# Altium PCB PCB2.PcbDoc
Units mil, origin at the board's own origin, x right, y up, seen from the top; angles counter-clockwise.
Board outline 6000 x 4000 mil, 2 copper layers (Top Layer, Bottom Layer); 120 components, 8 nets, 480 pads, 0 vias.
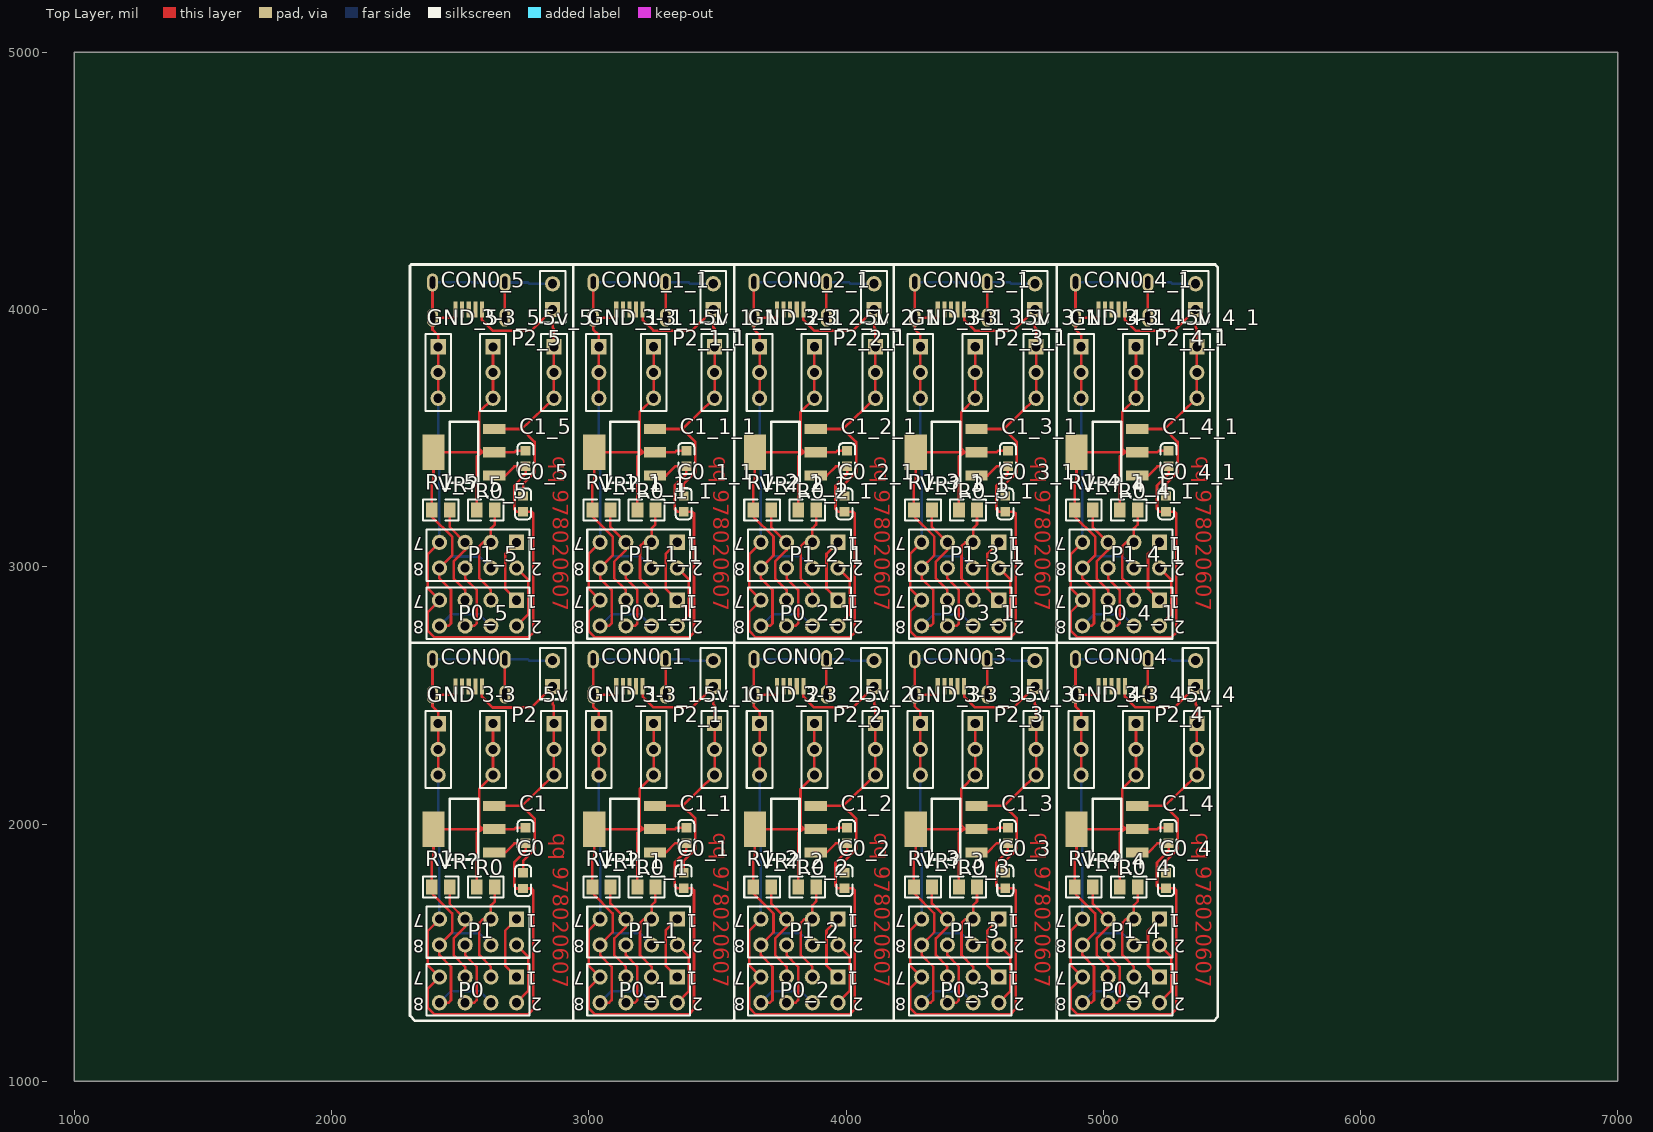
[diagram p0: Top Layer view]
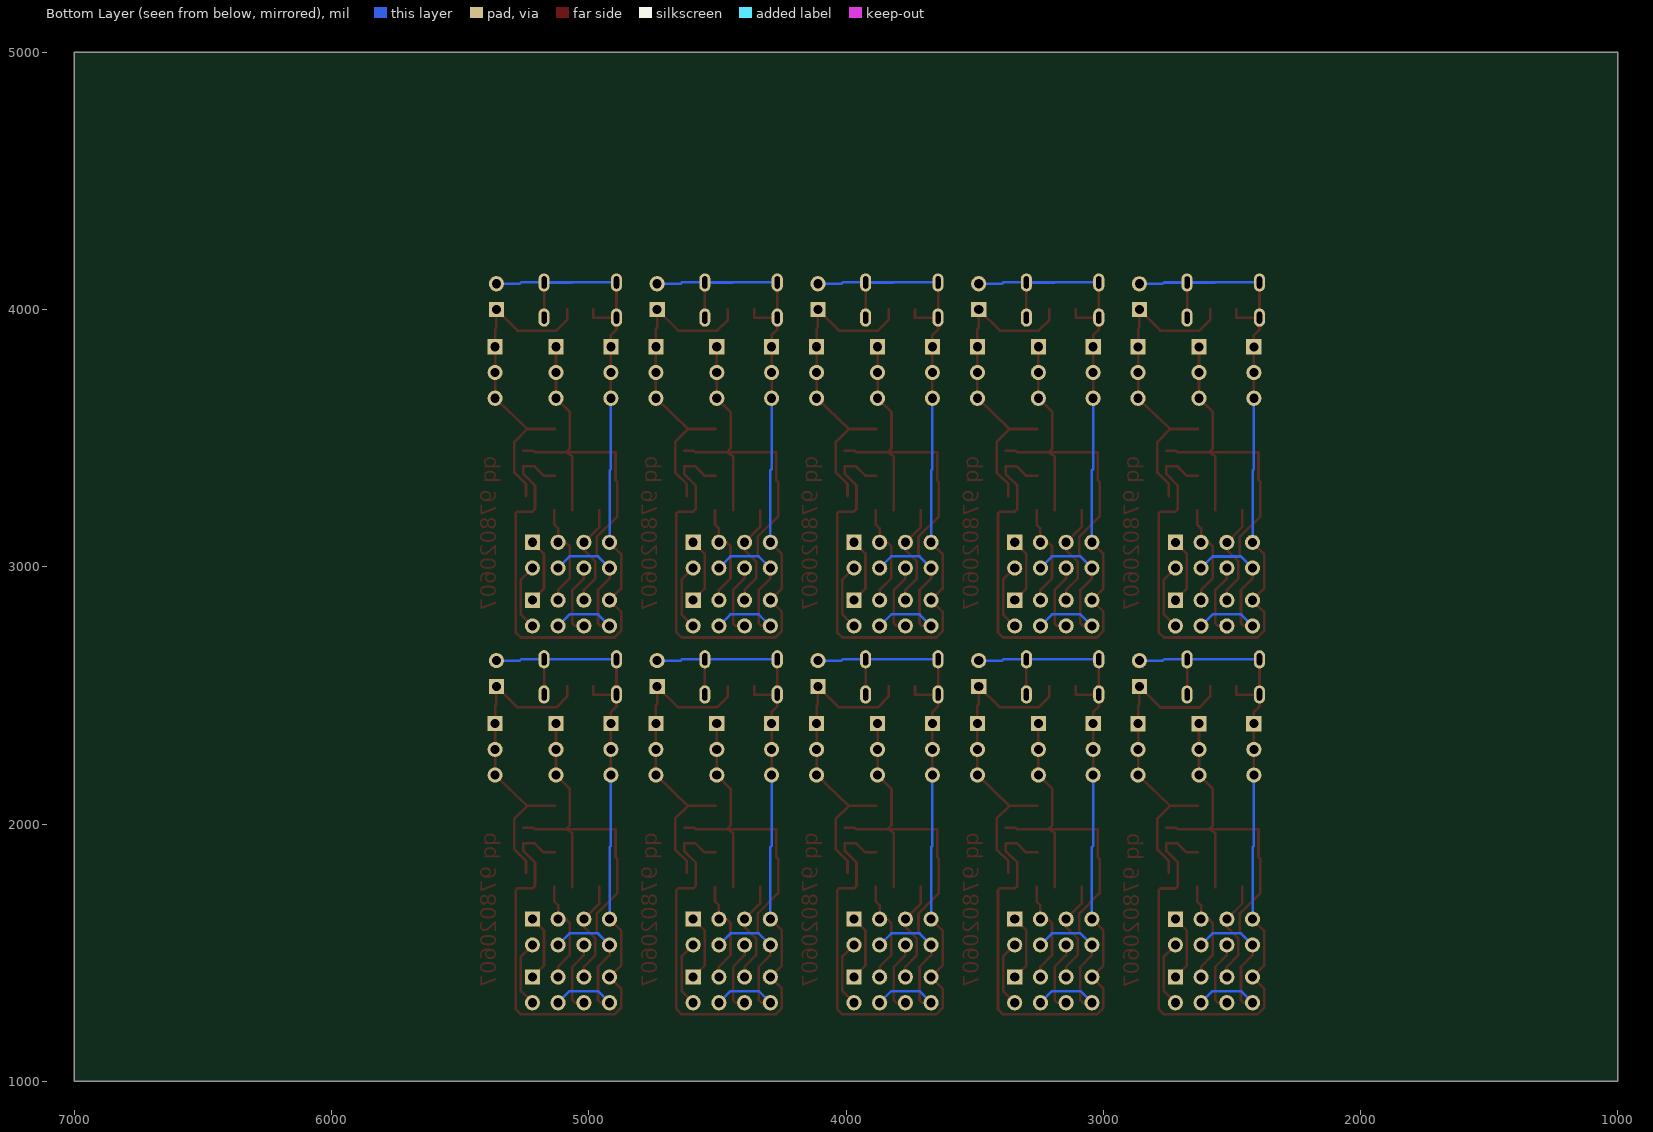
[diagram p1: Bottom Layer view, seen from below]

## Layer stack, top to bottom
Top Solder: solder mask 0.4, Solder Resist, Dk 3.5
Top Layer: signal copper 1.4
Dielectric 1: dielectric 12.6, FR-4, Dk 4.8
Bottom Layer: signal copper 1.4
Bottom Solder: solder mask 0.4, Solder Resist, Dk 3.5

## Board outline
1000,1000 7000,1000 7000,5000 1000,5000

## Design rules (kind name [scope] priority, off if disabled: settings)
Clearance [All] p1: gap=10 ignorepadtopadclearanceinfootprint=FALSE except(0: Arc-Hole Track-Hole SMDPad-Hole THPad-Hole Via-Hole Fill-Hole Poly-Hole Region-Hole Text-Hole)
PolygonConnect [All] p1: connectstyle=Relief reliefconductorwidth=10 reliefentries=4 polygonreliefangle="90 Angle" airgapwidth=10
RoomDefinition Sheet1 [InComponentClass('Sheet1')] p1: confinementstyle=ConfineIn formatcopy=TRUE lockcomponents=FALSE outline 2940,1239.88 2940,2705 2315,2705 2315,1239.88
RoomDefinition Sheet_9 [InComponentClass('Sheet1')] p2: confinementstyle=ConfineIn formatcopy=TRUE lockcomponents=FALSE outline 2940,2704.88 2940,4170 2315,4170 2315,2704.88
RoomDefinition Sheet_8 [InComponentClass('Sheet1')] p3: confinementstyle=ConfineIn formatcopy=TRUE lockcomponents=FALSE outline 3564.57,2705 3564.57,4170.12 2939.57,4170.12 2939.57,2705
RoomDefinition Sheet_7 [InComponentClass('Sheet1')] p4: confinementstyle=ConfineIn formatcopy=TRUE lockcomponents=FALSE outline 4189.57,2705 4189.57,4170.12 3564.57,4170.12 3564.57,2705
RoomDefinition Sheet_6 [InComponentClass('Sheet1')] p5: confinementstyle=ConfineIn formatcopy=TRUE lockcomponents=FALSE outline 4814.57,2705 4814.57,4170.12 4189.57,4170.12 4189.57,2705
RoomDefinition Sheet_5 [InComponentClass('Sheet1')] p6: confinementstyle=ConfineIn formatcopy=TRUE lockcomponents=FALSE outline 5439.57,2705 5439.57,4170.12 4814.57,4170.12 4814.57,2705
RoomDefinition Sheet_4 [InComponentClass('Sheet1')] p7: confinementstyle=ConfineIn formatcopy=TRUE lockcomponents=FALSE outline 5439.57,1240 5439.57,2705.12 4814.57,2705.12 4814.57,1240
RoomDefinition Sheet_3 [InComponentClass('Sheet1')] p8: confinementstyle=ConfineIn formatcopy=TRUE lockcomponents=FALSE outline 4814.57,1240 4814.57,2705.12 4189.57,2705.12 4189.57,1240
RoomDefinition Sheet_2 [InComponentClass('Sheet1')] p9: confinementstyle=ConfineIn formatcopy=TRUE lockcomponents=FALSE outline 4189.57,1240 4189.57,2705.12 3564.57,2705.12 3564.57,1240
RoomDefinition Sheet_1 [InComponentClass('Sheet1')] p10: confinementstyle=ConfineIn formatcopy=TRUE lockcomponents=FALSE outline 3564.57,1240 3564.57,2705.12 2939.57,2705.12 2939.57,1240
RoutingVias [All] p1: holewidth=28 width=50 viastyle="Through Hole" minholewidth=28 minwidth=50 maxholewidth=28 maxwidth=50
SolderMaskExpansion [All] p1: expansion=4
Width [All] p1: maxlimit=10 minlimit=10 preferedwidth=10
30 further rules are at their usual default settings.

## Classes and differential pairs
component class Sheet1: 3-3 5v C0 CON0 GND P0 P1 P2 R0 R1 VR?

## Components (designator, comment, footprint, x,y, rotation, side; value= is the part's Value field where it differs from the comment)
3-3 "Header 3" HDR1X3 2627.68,2390 r270 top
3-3_1 "Header 3" HDR1X3 3252.24,2390.12 r270 top (schematic designator 3-3)
3-3_1_1 "Header 3" HDR1X3 3252.24,3855.12 r270 top (schematic designator 3-3)
3-3_2 "Header 3" HDR1X3 3877.24,2390.12 r270 top (schematic designator 3-3)
3-3_2_1 "Header 3" HDR1X3 3877.24,3855.12 r270 top (schematic designator 3-3)
3-3_3 "Header 3" HDR1X3 4502.24,2390.12 r270 top (schematic designator 3-3)
3-3_3_1 "Header 3" HDR1X3 4502.24,3855.12 r270 top (schematic designator 3-3)
3-3_4 "Header 3" HDR1X3 5127.24,2390.12 r270 top (schematic designator 3-3)
3-3_4_1 "Header 3" HDR1X3 5127.24,3855.12 r270 top (schematic designator 3-3)
3-3_5 "Header 3" HDR1X3 2627.68,3855 r270 top (schematic designator 3-3)
5v "Header 3" HDR1X3 2864.57,2390 r270 top
5v_1 "Header 3" HDR1X3 3489.13,2390.12 r270 top (schematic designator 5v)
5v_1_1 "Header 3" HDR1X3 3489.13,3855.12 r270 top (schematic designator 5v)
5v_2 "Header 3" HDR1X3 4114.13,2390.12 r270 top (schematic designator 5v)
5v_2_1 "Header 3" HDR1X3 4114.13,3855.12 r270 top (schematic designator 5v)
5v_3 "Header 3" HDR1X3 4739.13,2390.12 r270 top (schematic designator 5v)
5v_3_1 "Header 3" HDR1X3 4739.13,3855.12 r270 top (schematic designator 5v)
5v_4 "Header 3" HDR1X3 5364.13,2390.12 r270 top (schematic designator 5v)
5v_4_1 "Header 3" HDR1X3 5364.13,3855.12 r270 top (schematic designator 5v)
5v_5 "Header 3" HDR1X3 2864.57,3855 r270 top (schematic designator 5v)
C0 "10uF (106) 10% 10V" LC-0603_C 2744.57,1779.68 r90 top
C0_1 "10uF (106) 10% 10V" LC-0603_C 3369.13,1779.8 r90 top (schematic designator C0)
C0_1_1 "10uF (106) 10% 10V" LC-0603_C 3369.13,3244.8 r90 top (schematic designator C0)
C0_2 "10uF (106) 10% 10V" LC-0603_C 3994.13,1779.8 r90 top (schematic designator C0)
C0_2_1 "10uF (106) 10% 10V" LC-0603_C 3994.13,3244.8 r90 top (schematic designator C0)
C0_3 "10uF (106) 10% 10V" LC-0603_C 4619.13,1779.8 r90 top (schematic designator C0)
C0_3_1 "10uF (106) 10% 10V" LC-0603_C 4619.13,3244.8 r90 top (schematic designator C0)
C0_4 "10uF (106) 10% 10V" LC-0603_C 5244.13,1779.8 r90 top (schematic designator C0)
C0_4_1 "10uF (106) 10% 10V" LC-0603_C 5244.13,3244.8 r90 top (schematic designator C0)
C0_5 "10uF (106) 10% 10V" LC-0603_C 2744.57,3244.68 r90 top (schematic designator C0)
C1 "10uF (106) 10% 10V" LC-0603_C 2754.57,1955.31 r90 top
C1_1 "10uF (106) 10% 10V" LC-0603_C 3379.13,1955.43 r90 top (schematic designator C1)
C1_1_1 "10uF (106) 10% 10V" LC-0603_C 3379.13,3420.43 r90 top (schematic designator C1)
C1_2 "10uF (106) 10% 10V" LC-0603_C 4004.13,1955.43 r90 top (schematic designator C1)
C1_2_1 "10uF (106) 10% 10V" LC-0603_C 4004.13,3420.43 r90 top (schematic designator C1)
C1_3 "10uF (106) 10% 10V" LC-0603_C 4629.13,1955.43 r90 top (schematic designator C1)
C1_3_1 "10uF (106) 10% 10V" LC-0603_C 4629.13,3420.43 r90 top (schematic designator C1)
C1_4 "10uF (106) 10% 10V" LC-0603_C 5254.13,1955.43 r90 top (schematic designator C1)
C1_4_1 "10uF (106) 10% 10V" LC-0603_C 5254.13,3420.43 r90 top (schematic designator C1)
C1_5 "10uF (106) 10% 10V" LC-0603_C 2754.57,3420.31 r90 top (schematic designator C1)
CON0 "USB_Connector" MicroUSB 2533.39,2503.5 r270 top
CON0_1 "USB_Connector" MicroUSB 3157.95,2503.62 r270 top (schematic designator CON0)
CON0_1_1 "USB_Connector" MicroUSB 3157.95,3968.62 r270 top (schematic designator CON0)
CON0_2 "USB_Connector" MicroUSB 3782.95,2503.62 r270 top (schematic designator CON0)
CON0_2_1 "USB_Connector" MicroUSB 3782.95,3968.62 r270 top (schematic designator CON0)
CON0_3 "USB_Connector" MicroUSB 4407.95,2503.62 r270 top (schematic designator CON0)
CON0_3_1 "USB_Connector" MicroUSB 4407.95,3968.62 r270 top (schematic designator CON0)
CON0_4 "USB_Connector" MicroUSB 5032.95,2503.62 r270 top (schematic designator CON0)
CON0_4_1 "USB_Connector" MicroUSB 5032.95,3968.62 r270 top (schematic designator CON0)
CON0_5 "USB_Connector" MicroUSB 2533.39,3968.5 r270 top (schematic designator CON0)
GND "Header 3" HDR1X3 2414.57,2390 r270 top
GND_1 "Header 3" HDR1X3 3039.13,2390.12 r270 top (schematic designator GND)
GND_1_1 "Header 3" HDR1X3 3039.13,3855.12 r270 top (schematic designator GND)
GND_2 "Header 3" HDR1X3 3664.13,2390.12 r270 top (schematic designator GND)
GND_2_1 "Header 3" HDR1X3 3664.13,3855.12 r270 top (schematic designator GND)
GND_3 "Header 3" HDR1X3 4289.13,2390.12 r270 top (schematic designator GND)
GND_3_1 "Header 3" HDR1X3 4289.13,3855.12 r270 top (schematic designator GND)
GND_4 "Header 3" HDR1X3 4914.13,2390.12 r270 top (schematic designator GND)
GND_4_1 "Header 3" HDR1X3 4914.13,3855.12 r270 top (schematic designator GND)
GND_5 "Header 3" HDR1X3 2414.57,3855 r270 top (schematic designator GND)
P0 "Header 4X2" HDR2X4 2719.57,1405 r180 top
P0_1 "Header 4X2" HDR2X4 3344.13,1405.12 r180 top (schematic designator P0)
P0_1_1 "Header 4X2" HDR2X4 3344.13,2870.12 r180 top (schematic designator P0)
P0_2 "Header 4X2" HDR2X4 3969.13,1405.12 r180 top (schematic designator P0)
P0_2_1 "Header 4X2" HDR2X4 3969.13,2870.12 r180 top (schematic designator P0)
P0_3 "Header 4X2" HDR2X4 4594.13,1405.12 r180 top (schematic designator P0)
P0_3_1 "Header 4X2" HDR2X4 4594.13,2870.12 r180 top (schematic designator P0)
P0_4 "Header 4X2" HDR2X4 5219.13,1405.12 r180 top (schematic designator P0)
P0_4_1 "Header 4X2" HDR2X4 5219.13,2870.12 r180 top (schematic designator P0)
P0_5 "Header 4X2" HDR2X4 2719.57,2870 r180 top (schematic designator P0)
P1 "Header 4X2" HDR2X4 2719.57,1630 r180 top
P1_1 "Header 4X2" HDR2X4 3344.13,1630.12 r180 top (schematic designator P1)
P1_1_1 "Header 4X2" HDR2X4 3344.13,3095.12 r180 top (schematic designator P1)
P1_2 "Header 4X2" HDR2X4 3969.13,1630.12 r180 top (schematic designator P1)
P1_2_1 "Header 4X2" HDR2X4 3969.13,3095.12 r180 top (schematic designator P1)
P1_3 "Header 4X2" HDR2X4 4594.13,1630.12 r180 top (schematic designator P1)
P1_3_1 "Header 4X2" HDR2X4 4594.13,3095.12 r180 top (schematic designator P1)
P1_4 "Header 4X2" HDR2X4 5219.13,1630.12 r180 top (schematic designator P1)
P1_4_1 "Header 4X2" HDR2X4 5219.13,3095.12 r180 top (schematic designator P1)
P1_5 "Header 4X2" HDR2X4 2719.57,3095 r180 top (schematic designator P1)
P2 "Header 2" HDR1X2 2859.57,2535 r90 top
P2_1 "Header 2" HDR1X2 3484.13,2535.12 r90 top (schematic designator P2)
P2_1_1 "Header 2" HDR1X2 3484.13,4000.12 r90 top (schematic designator P2)
P2_2 "Header 2" HDR1X2 4109.13,2535.12 r90 top (schematic designator P2)
P2_2_1 "Header 2" HDR1X2 4109.13,4000.12 r90 top (schematic designator P2)
P2_3 "Header 2" HDR1X2 4734.13,2535.12 r90 top (schematic designator P2)
P2_3_1 "Header 2" HDR1X2 4734.13,4000.12 r90 top (schematic designator P2)
P2_4 "Header 2" HDR1X2 5359.13,2535.12 r90 top (schematic designator P2)
P2_4_1 "Header 2" HDR1X2 5359.13,4000.12 r90 top (schematic designator P2)
P2_5 "Header 2" HDR1X2 2859.57,4000 r90 top (schematic designator P2)
R0 "10KΩ (1002) ±1%" LC-0805_R 2599.61,1755 r180 top
R0_1 "10KΩ (1002) ±1%" LC-0805_R 3224.17,1755.12 r180 top (schematic designator R0)
R0_1_1 "10KΩ (1002) ±1%" LC-0805_R 3224.17,3220.12 r180 top (schematic designator R0)
R0_2 "10KΩ (1002) ±1%" LC-0805_R 3849.17,1755.12 r180 top (schematic designator R0)
R0_2_1 "10KΩ (1002) ±1%" LC-0805_R 3849.17,3220.12 r180 top (schematic designator R0)
R0_3 "10KΩ (1002) ±1%" LC-0805_R 4474.17,1755.12 r180 top (schematic designator R0)
R0_3_1 "10KΩ (1002) ±1%" LC-0805_R 4474.17,3220.12 r180 top (schematic designator R0)
R0_4 "10KΩ (1002) ±1%" LC-0805_R 5099.17,1755.12 r180 top (schematic designator R0)
R0_4_1 "10KΩ (1002) ±1%" LC-0805_R 5099.17,3220.12 r180 top (schematic designator R0)
R0_5 "10KΩ (1002) ±1%" LC-0805_R 2599.61,3220 r180 top (schematic designator R0)
R1 "10KΩ (1002) ±1%" LC-0805_R 2424.57,1755 r180 top
R1_1 "10KΩ (1002) ±1%" LC-0805_R 3049.13,1755.12 r180 top (schematic designator R1)
R1_1_1 "10KΩ (1002) ±1%" LC-0805_R 3049.13,3220.12 r180 top (schematic designator R1)
R1_2 "10KΩ (1002) ±1%" LC-0805_R 3674.13,1755.12 r180 top (schematic designator R1)
R1_2_1 "10KΩ (1002) ±1%" LC-0805_R 3674.13,3220.12 r180 top (schematic designator R1)
R1_3 "10KΩ (1002) ±1%" LC-0805_R 4299.13,1755.12 r180 top (schematic designator R1)
R1_3_1 "10KΩ (1002) ±1%" LC-0805_R 4299.13,3220.12 r180 top (schematic designator R1)
R1_4 "10KΩ (1002) ±1%" LC-0805_R 4924.13,1755.12 r180 top (schematic designator R1)
R1_4_1 "10KΩ (1002) ±1%" LC-0805_R 4924.13,3220.12 r180 top (schematic designator R1)
R1_5 "10KΩ (1002) ±1%" LC-0805_R 2424.57,3220 r180 top (schematic designator R1)
VR? "AMS1117-3.3" LC-SOT-223 2514.57,1980 r0 top
VR?_1 "AMS1117-3.3" LC-SOT-223 3139.13,1980.12 r0 top (schematic designator VR?)
VR?_1_1 "AMS1117-3.3" LC-SOT-223 3139.13,3445.12 r0 top (schematic designator VR?)
VR?_2 "AMS1117-3.3" LC-SOT-223 3764.13,1980.12 r0 top (schematic designator VR?)
VR?_2_1 "AMS1117-3.3" LC-SOT-223 3764.13,3445.12 r0 top (schematic designator VR?)
VR?_3 "AMS1117-3.3" LC-SOT-223 4389.13,1980.12 r0 top (schematic designator VR?)
VR?_3_1 "AMS1117-3.3" LC-SOT-223 4389.13,3445.12 r0 top (schematic designator VR?)
VR?_4 "AMS1117-3.3" LC-SOT-223 5014.13,1980.12 r0 top (schematic designator VR?)
VR?_4_1 "AMS1117-3.3" LC-SOT-223 5014.13,3445.12 r0 top (schematic designator VR?)
VR?_5 "AMS1117-3.3" LC-SOT-223 2514.57,3445 r0 top (schematic designator VR?)

## Footprints (in the part's own frame and the unit in brackets; to place one, negate y for a bottom-side part, rotate by r counter-clockwise, add the part's x,y. Pads: shape width x height; smd on the part's side, far side on the other; paste and mask are expansions set on the pad)
HDR1X2 [mm] "Connector; Header; 2 Position"
  rect 1.5x1.5 hole 0.9: 1(0,0)
  round 1.5 hole 0.9: 2(2.54,0)
  silkscreen extent -1.27,-1.27 3.81,1.27
HDR1X3 [mm] "Connector; Header; 3 Position"
  rect 1.5x1.5 hole 0.9: 1(0,0)
  round 1.5 hole 0.9: 2(2.54,0) 3(5.08,0)
  silkscreen extent -1.27,-1.27 6.35,1.27
HDR2X4 [mm] "Connector; Header; 4x2 Position"
  rect 1.5x1.5 hole 0.9: 1(0,0)
  round 1.5 hole 0.9: 2(0,2.54) 3(2.54,0) 4(2.54,2.54) 5(5.08,0) 6(5.08,2.54) 7(7.62,0) 8(7.62,2.54)
  silkscreen extent -1.27,-1.27 8.89,3.81
LC-0603_C [mm]
  rect 0.93x0.98 smd: 1(-0.77,0) 2(0.77,0)
  silkscreen extent -1.53,-0.79 1.54,0.79, body extent -0.8,-0.4 0.8,0.4, height 0.3
LC-0805_R [mm]
  rect 1.16x1.47 smd: 1(-0.89,0) 2(0.89,0)
  silkscreen extent -1.77,-1.03 1.77,1.03, body extent -1,-0.62 1,0.63, height 0.49
LC-SOT-223 [mm]
  rect 2.2x1 smd: 1(3,-2.3) 2(3,0) 3(3,2.3)
  rect 2.2x3.5 smd: 2(-3,0)
  silkscreen extent -1.4,-3 1.4,3, body extent -3.49,-3.24 3.49,3.24, height 1.64
MicroUSB [mm]
  rect 1.6x0.4 smd mask+0.05: 1(-0.8,1.3) 2(-0.8,0.65) 3(-0.8,0) 4(-0.8,-0.65) 5(-0.8,-1.3)
  oval 1.8x1.1 hole 0.5 slot 1.2 at 0 deg: GND(-3.47,3.575) GND(-3.47,-3.575) GND(0,3.575) GND(0,-3.575)

## Part data
3-3 3-3_1 3-3_1_1 3-3_2 3-3_2_1 3-3_3 3-3_3_1 3-3_4 3-3_4_1 3-3_5 5v 5v_1 5v_1_1 5v_2 5v_2_1 5v_3 5v_3_1 5v_4 5v_4_1 5v_5 GND GND_1 GND_1_1 GND_2 GND_2_1 GND_3 GND_3_1 GND_4 GND_4_1 GND_5: "Header, 3-Pin", LatestRevisionDate=17-Jul-2002, LatestRevisionNote="Re-released for DXP Platform.", Publisher="Altium Limited"
C0 C0_1 C0_1_1 C0_2 C0_2_1 C0_3 C0_3_1 C0_4 C0_4_1 C0_5 C1 C1_1 C1_1_1 C1_2 C1_2_1 C1_3 C1_3_1 C1_4 C1_4_1 C1_5: library part "0603 10uF (106) 10% 10V", "贴片电容", Package=0603, SuppliersPartNumber=C19702, ComponentLink1Description=供?, ComponentLink1URL=http://www.szlcsc.com/product/details_20411.html, Supplier=LC
P0 P0_1 P0_1_1 P0_2 P0_2_1 P0_3 P0_3_1 P0_4 P0_4_1 P0_5 P1 P1_1 P1_1_1 P1_2 P1_2_1 P1_3 P1_3_1 P1_4 P1_4_1 P1_5: "Header, 4-Pin, Dual row", LatestRevisionDate=17-Jul-2002, LatestRevisionNote="Re-released for DXP Platform.", Publisher="Altium Limited"
P2 P2_1 P2_1_1 P2_2 P2_2_1 P2_3 P2_3_1 P2_4 P2_4_1 P2_5: "Header, 2-Pin", LatestRevisionDate=17-Jul-2002, LatestRevisionNote="Re-released for DXP Platform.", Publisher="Altium Limited"
R0 R0_1 R0_1_1 R0_2 R0_2_1 R0_3 R0_3_1 R0_4 R0_4_1 R0_5 R1 R1_1 R1_1_1 R1_2 R1_2_1 R1_3 R1_3_1 R1_4 R1_4_1 R1_5: library part "0805 10KΩ (1002) 1%", "贴片电阻", Package=0805, SuppliersPartNumber=C17414, ComponentLink1Description=供?, ComponentLink1URL=http://www.szlcsc.com/product/details_18102.html, Supplier=LC
VR? VR?_1 VR?_1_1 VR?_2 VR?_2_1 VR?_3 VR?_3_1 VR?_4 VR?_4_1 VR?_5: library part "SOT-223 AMS1117-3.3", "低压差线性稳压(LDO)", Package=SOT-223, SuppliersPartNumber=C6186, ComponentLink1Description=供?, ComponentLink1URL=http://www.szlcsc.com/product/details_6652.html, Supplier=LC

## Nets (pads, with @x,y where several pads share a name; then routed paths per layer and width w, separated by ;. In a path a pad name is that pad's centre, name@x,y a point inside that pad or via, vN(x,y) a via of type N, cw(c..) or ccw(c..) an arc to the next point about the centre after c; other vN are vias at no path point)
Net3-3_1: 3-3.1 3-3.2 3-3.3 C1.2 P0.4 P0.8 P1.4 P1.8 R0.2 R1.2 VR?.2 | length 2300.6
  Top Layer w10: P0.8 2454.57,1305 2464.57,1315 2464.57,1445 2419.57,1490 P1.8 2468.57,1579 2468.57,1652 2389.53,1731.04 R1.2 2389.53,1864 2396.46,1870.93 2396.46,1980 2588.57,1980 ; R0.2 2564.57,1965 2588.57,1980 ; 3-3.1 3-3.2 3-3.3 2573.57,2135.89 2573.57,1995 2588.57,1980 ; C1.2 2716.61,1985.63 2710.99,1980 2632.68,1980 2588.57,1980
  Bottom Layer w10: P0.8 2464.57,1350 2574.57,1350 P0.4 ; P1.8 2464.57,1575 2574.57,1575 P1.4
Net5v_1: 5v.1 5v.2 5v.3 C0.2 CON0.1 P2.1 VR?.3 | length 1293.1
  Top Layer w10: CON0.1 2584.57,2495 2626.57,2453 2777.57,2453 P2.1 2859.57,2465 2864.57,2460 5v.1 5v.2 5v.3 2739.57,2070.55 ; VR?.3 2739.57,2070.55 ; C0.2 2744.57,1856 2789.57,1901 2789.57,2020.55 2739.57,2070.55
NetC0_1: C0.1 C1.1 CON0.5 CON0.GND GND.1 GND.2 GND.3 P0.7 P1.7 P2.2 VR?.1 | length 3444.8
  Top Layer w10: CON0.GND@2392.64,2640.12 2392.64,2503.5 CON0.GND@2392.64,2503 ; GND.3 GND.2 GND.1 2414.57,2435 2392.64,2456.93 CON0.GND@2392.64,2503 ; P1.7 2374.57,1585 2374.57,1450 P0.7 2374.57,1360 2374.57,1285 2399.57,1260 2764.57,1260 2784.57,1280 2784.57,1742.37 2777.57,1749.37 C0.1 2719.57,1749.37 2709.57,1759.37 2709.57,1850 2754.57,1895 C1.1 2711.12,1925 2675.57,1889.45 VR?.1 ; CON0.5 2482.2,2503 CON0.GND@2392.64,2503 ; CON0.GND@2674.14,2503.5 CON0.GND@2674.14,2640.12
  Bottom Layer w10: CON0.GND@2392.64,2640.12 2392.64,2641 2565.57,2641 2566.57,2640 2674.14,2640 2674.14,2640.12 2763.57,2640.12 2768.68,2635 P2.2 ; GND.3 2414.57,1915 2419.57,1910 P1.7
NetP0_1: P0.1 P1.1 | length 262.3
  Top Layer w10: P0.1 2674.57,1450 2674.57,1585 P1.1
NetP0_2: P0.2 P1.2 | length 262.3
  Top Layer w10: P0.2 2764.57,1350 2764.57,1485 P1.2
NetP0_3: P0.3 P1.3 R0.1 | length 411.1
  Top Layer w10: P0.3 2619.57,1445 2574.57,1490 2574.57,1615 2589.57,1630 P1.3 2619.57,1684 2634.64,1699.08 R0.1
NetP0_5: P0.5 P1.5 R1.1 | length 412.1
  Top Layer w10: R1.1 2459.61,1689.96 P1.5 2519.57,1600 2474.57,1555 2474.57,1490 2519.57,1445 P0.5
NetP0_6: P0.6 P1.6 | length 282.8
  Top Layer w10: P0.6 2554.57,1305 2564.57,1315 2564.57,1445 2519.57,1490 P1.6
pads on no net: 3-3_1.1 3-3_1.2 3-3_1.3 3-3_1_1.1 3-3_1_1.2 3-3_1_1.3 3-3_2.1 3-3_2.2 3-3_2.3 3-3_2_1.1 3-3_2_1.2 3-3_2_1.3 3-3_3.1 3-3_3.2 3-3_3.3 3-3_3_1.1 3-3_3_1.2 3-3_3_1.3 3-3_4.1 3-3_4.2 3-3_4.3 3-3_4_1.1 3-3_4_1.2 3-3_4_1.3 3-3_5.1 3-3_5.2 3-3_5.3 5v_1.1 5v_1.2 5v_1.3 5v_1_1.1 5v_1_1.2 5v_1_1.3 5v_2.1 5v_2.2 5v_2.3 5v_2_1.1 5v_2_1.2 5v_2_1.3 5v_3.1 5v_3.2 5v_3.3 5v_3_1.1 5v_3_1.2 5v_3_1.3 5v_4.1 5v_4.2 5v_4.3 5v_4_1.1 5v_4_1.2 5v_4_1.3 5v_5.1 5v_5.2 5v_5.3 C0_1.1 C0_1.2 C0_1_1.1 C0_1_1.2 C0_2.1 C0_2.2 C0_2_1.1 C0_2_1.2 C0_3.1 C0_3.2 C0_3_1.1 C0_3_1.2 C0_4.1 C0_4.2 C0_4_1.1 C0_4_1.2 C0_5.1 C0_5.2 C1_1.1 C1_1.2 C1_1_1.1 C1_1_1.2 C1_2.1 C1_2.2 C1_2_1.1 C1_2_1.2 C1_3.1 C1_3.2 C1_3_1.1 C1_3_1.2 C1_4.1 C1_4.2 C1_4_1.1 C1_4_1.2 C1_5.1 C1_5.2 CON0.2 CON0.3 CON0.4 CON0_1.1 CON0_1.2 CON0_1.3 CON0_1.4 CON0_1.5 CON0_1.GND CON0_1_1.1 CON0_1_1.2 CON0_1_1.3 CON0_1_1.4 CON0_1_1.5 CON0_1_1.GND CON0_2.1 CON0_2.2 CON0_2.3 CON0_2.4 CON0_2.5 CON0_2.GND CON0_2_1.1 CON0_2_1.2 CON0_2_1.3 CON0_2_1.4 CON0_2_1.5 CON0_2_1.GND CON0_3.1 CON0_3.2 CON0_3.3 CON0_3.4 CON0_3.5 CON0_3.GND CON0_3_1.1 CON0_3_1.2 CON0_3_1.3 CON0_3_1.4 CON0_3_1.5 CON0_3_1.GND CON0_4.1 CON0_4.2 CON0_4.3 CON0_4.4 CON0_4.5 CON0_4.GND CON0_4_1.1 CON0_4_1.2 CON0_4_1.3 CON0_4_1.4 CON0_4_1.5 CON0_4_1.GND CON0_5.1 CON0_5.2 CON0_5.3 CON0_5.4 CON0_5.5 CON0_5.GND GND_1.1 GND_1.2 GND_1.3 GND_1_1.1 GND_1_1.2 GND_1_1.3 GND_2.1 GND_2.2 GND_2.3 GND_2_1.1 GND_2_1.2 GND_2_1.3 GND_3.1 GND_3.2 GND_3.3 GND_3_1.1 GND_3_1.2 GND_3_1.3 GND_4.1 GND_4.2 GND_4.3 GND_4_1.1 GND_4_1.2 GND_4_1.3 GND_5.1 GND_5.2 GND_5.3 P0_1.1 P0_1.2 P0_1.3 P0_1.4 P0_1.5 P0_1.6 P0_1.7 P0_1.8 P0_1_1.1 P0_1_1.2 P0_1_1.3 P0_1_1.4 P0_1_1.5 P0_1_1.6 P0_1_1.7 P0_1_1.8 P0_2.1 P0_2.2 P0_2.3 P0_2.4 P0_2.5 P0_2.6 P0_2.7 P0_2.8 P0_2_1.1 P0_2_1.2 P0_2_1.3 P0_2_1.4 P0_2_1.5 P0_2_1.6 P0_2_1.7 P0_2_1.8 P0_3.1 P0_3.2 P0_3.3 P0_3.4 P0_3.5 P0_3.6 P0_3.7 P0_3.8 P0_3_1.1 P0_3_1.2 P0_3_1.3 P0_3_1.4 P0_3_1.5 P0_3_1.6 P0_3_1.7 P0_3_1.8 P0_4.1 P0_4.2 P0_4.3 P0_4.4 P0_4.5 P0_4.6 P0_4.7 P0_4.8 P0_4_1.1 P0_4_1.2 P0_4_1.3 P0_4_1.4 P0_4_1.5 P0_4_1.6 P0_4_1.7 P0_4_1.8 P0_5.1 P0_5.2 P0_5.3 P0_5.4 P0_5.5 P0_5.6 P0_5.7 P0_5.8 P1_1.1 P1_1.2 P1_1.3 P1_1.4 P1_1.5 P1_1.6 P1_1.7 P1_1.8 P1_1_1.1 P1_1_1.2 P1_1_1.3 P1_1_1.4 P1_1_1.5 P1_1_1.6 P1_1_1.7 P1_1_1.8 P1_2.1 P1_2.2 P1_2.3 P1_2.4 P1_2.5 P1_2.6 P1_2.7 P1_2.8 P1_2_1.1 P1_2_1.2 P1_2_1.3 P1_2_1.4 P1_2_1.5 P1_2_1.6 P1_2_1.7 P1_2_1.8 P1_3.1 P1_3.2 P1_3.3 P1_3.4 P1_3.5 P1_3.6 P1_3.7 P1_3.8 P1_3_1.1 P1_3_1.2 P1_3_1.3 P1_3_1.4 P1_3_1.5 P1_3_1.6 P1_3_1.7 P1_3_1.8 P1_4.1 P1_4.2 P1_4.3 P1_4.4 P1_4.5 P1_4.6 P1_4.7 P1_4.8 P1_4_1.1 P1_4_1.2 P1_4_1.3 P1_4_1.4 P1_4_1.5 P1_4_1.6 P1_4_1.7 P1_4_1.8 P1_5.1 P1_5.2 P1_5.3 P1_5.4 P1_5.5 P1_5.6 P1_5.7 P1_5.8 P2_1.1 P2_1.2 P2_1_1.1 P2_1_1.2 P2_2.1 P2_2.2 P2_2_1.1 P2_2_1.2 P2_3.1 P2_3.2 P2_3_1.1 P2_3_1.2 P2_4.1 P2_4.2 P2_4_1.1 P2_4_1.2 P2_5.1 P2_5.2 R0_1.1 R0_1.2 R0_1_1.1 R0_1_1.2 R0_2.1 R0_2.2 R0_2_1.1 R0_2_1.2 R0_3.1 R0_3.2 R0_3_1.1 R0_3_1.2 R0_4.1 R0_4.2 R0_4_1.1 R0_4_1.2 R0_5.1 R0_5.2 R1_1.1 R1_1.2 R1_1_1.1 R1_1_1.2 R1_2.1 R1_2.2 R1_2_1.1 R1_2_1.2 R1_3.1 R1_3.2 R1_3_1.1 R1_3_1.2 R1_4.1 R1_4.2 R1_4_1.1 R1_4_1.2 R1_5.1 R1_5.2 VR?_1.1 VR?_1.2 VR?_1.3 VR?_1_1.1 VR?_1_1.2 VR?_1_1.3 VR?_2.1 VR?_2.2 VR?_2.3 VR?_2_1.1 VR?_2_1.2 VR?_2_1.3 VR?_3.1 VR?_3.2 VR?_3.3 VR?_3_1.1 VR?_3_1.2 VR?_3_1.3 VR?_4.1 VR?_4.2 VR?_4.3 VR?_4_1.1 VR?_4_1.2 VR?_4_1.3 VR?_5.1 VR?_5.2 VR?_5.3
copper on no net: | length 78021.6
  Top Layer w10: 2392.64,4105.12 2392.64,3968.5 2392.64,3968 ; 2414.57,3655 2414.57,3755 2414.57,3855 2414.57,3900 2392.64,3921.93 2392.64,3968 ; 2419.57,2770 2454.57,2770 2464.57,2780 2464.57,2910 2419.57,2955 2419.57,2995 2468.57,3044 2468.57,3117 2389.53,3196.04 2389.53,3220 2389.53,3329 2396.46,3335.93 2396.46,3445 2588.57,3445 ; 2419.57,3095 2374.57,3050 2374.57,2915 2419.57,2870 2374.57,2825 2374.57,2750 2399.57,2725 2764.57,2725 2784.57,2745 2784.57,3207.37 2777.57,3214.37 2744.57,3214.37 2719.57,3214.37 2709.57,3224.37 2709.57,3315 2754.57,3360 2754.57,3390 2711.12,3390 2675.57,3354.45 2632.68,3354.45 ; 2459.61,3220 2459.61,3154.96 2519.57,3095 2519.57,3065 2474.57,3020 2474.57,2955 2519.57,2910 2519.57,2870 ; 2482.2,4000 2482.2,3968 2392.64,3968 ; 2519.57,2770 2554.57,2770 2564.57,2780 2564.57,2910 2519.57,2955 2519.57,2995 ; 2564.57,3220 2564.57,3430 2588.57,3445 ; 2584.57,4000 2584.57,3960 2626.57,3918 2777.57,3918 2859.57,4000 2859.57,3930 2864.57,3925 2864.57,3855 2864.57,3755 2864.57,3655 2739.57,3535.55 ; 2619.57,2870 2619.57,2910 2574.57,2955 2574.57,3080 2589.57,3095 2619.57,3095 2619.57,3149 2634.64,3164.08 2634.64,3220 ; 2627.68,3855 2627.68,3755 2627.68,3655 2573.57,3600.89 2573.57,3460 2588.57,3445 ; 2632.68,3535.55 2739.57,3535.55 ; 2674.14,3968.5 2674.14,4105.12 ; 2719.57,2770 2764.57,2815 2764.57,2950 2719.57,2995 ; 2719.57,2870 2674.57,2915 2674.57,3050 2719.57,3095 ; 2744.57,3275 2744.57,3321 2789.57,3366 2789.57,3485.55 2739.57,3535.55 ; 2754.57,3450.63 2716.61,3450.63 2710.99,3445 2632.68,3445 2588.57,3445 ; 3017.2,2640.24 3017.2,2503.62 3017.2,2503.12 ; 3017.2,4105.24 3017.2,3968.62 3017.2,3968.12 ; 3039.13,2190.12 3039.13,2290.12 3039.13,2390.12 3039.13,2435.12 3017.2,2457.05 3017.2,2503.12 ; 3039.13,3655.12 3039.13,3755.12 3039.13,3855.12 3039.13,3900.12 3017.2,3922.05 3017.2,3968.12 ; 3044.13,1305.12 3079.13,1305.12 3089.13,1315.12 3089.13,1445.12 3044.13,1490.12 3044.13,1530.12 3093.13,1579.12 3093.13,1652.12 3014.09,1731.16 3014.09,1755.12 3014.09,1864.12 3021.02,1871.05 3021.02,1980.12 3213.13,1980.12 ; 3044.13,1630.12 2999.13,1585.12 2999.13,1450.12 3044.13,1405.12 2999.13,1360.12 2999.13,1285.12 3024.13,1260.12 3389.13,1260.12 3409.13,1280.12 3409.13,1742.49 3402.13,1749.49 3369.13,1749.49 3344.13,1749.49 3334.13,1759.49 3334.13,1850.12 3379.13,1895.12 3379.13,1925.12 3335.69,1925.12 3300.13,1889.57 3257.24,1889.57 ; 3044.13,2770.12 3079.13,2770.12 3089.13,2780.12 3089.13,2910.12 3044.13,2955.12 3044.13,2995.12 3093.13,3044.12 3093.13,3117.12 3014.09,3196.16 3014.09,3220.12 3014.09,3329.12 3021.02,3336.05 3021.02,3445.12 3213.13,3445.12 ; 3044.13,3095.12 2999.13,3050.12 2999.13,2915.12 3044.13,2870.12 2999.13,2825.12 2999.13,2750.12 3024.13,2725.12 3389.13,2725.12 3409.13,2745.12 3409.13,3207.49 3402.13,3214.49 3369.13,3214.49 3344.13,3214.49 3334.13,3224.49 3334.13,3315.12 3379.13,3360.12 3379.13,3390.12 3335.69,3390.12 3300.13,3354.57 3257.24,3354.57 ; 3084.17,1755.12 3084.17,1690.08 3144.13,1630.12 3144.13,1600.12 3099.13,1555.12 3099.13,1490.12 3144.13,1445.12 3144.13,1405.12 ; 3084.17,3220.12 3084.17,3155.08 3144.13,3095.12 3144.13,3065.12 3099.13,3020.12 3099.13,2955.12 3144.13,2910.12 3144.13,2870.12 ; 3106.77,2535.12 3106.77,2503.12 3017.2,2503.12 ; 3106.77,4000.12 3106.77,3968.12 3017.2,3968.12 ; 3144.13,1305.12 3179.13,1305.12 3189.13,1315.12 3189.13,1445.12 3144.13,1490.12 3144.13,1530.12 ; 3144.13,2770.12 3179.13,2770.12 3189.13,2780.12 3189.13,2910.12 3144.13,2955.12 3144.13,2995.12 ; 3189.13,1755.12 3189.13,1965.12 3213.13,1980.12 ; 3189.13,3220.12 3189.13,3430.12 3213.13,3445.12 ; 3209.13,2535.12 3209.13,2495.12 3251.13,2453.12 3402.13,2453.12 3484.13,2535.12 3484.13,2465.12 3489.13,2460.12 3489.13,2390.12 3489.13,2290.12 3489.13,2190.12 3364.13,2070.67 ; 3209.13,4000.12 3209.13,3960.12 3251.13,3918.12 3402.13,3918.12 3484.13,4000.12 3484.13,3930.12 3489.13,3925.12 3489.13,3855.12 3489.13,3755.12 3489.13,3655.12 3364.13,3535.67 ; 3244.13,1405.12 3244.13,1445.12 3199.13,1490.12 3199.13,1615.12 3214.13,1630.12 3244.13,1630.12 3244.13,1684.12 3259.21,1699.2 3259.21,1755.12 ; 3244.13,2870.12 3244.13,2910.12 3199.13,2955.12 3199.13,3080.12 3214.13,3095.12 3244.13,3095.12 3244.13,3149.12 3259.21,3164.2 3259.21,3220.12 ; 3252.24,2390.12 3252.24,2290.12 3252.24,2190.12 3198.13,2136.01 3198.13,1995.12 3213.13,1980.12 ; 3252.24,3855.12 3252.24,3755.12 3252.24,3655.12 3198.13,3601.01 3198.13,3460.12 3213.13,3445.12 ; 3257.24,2070.67 3364.13,2070.67 ; 3257.24,3535.67 3364.13,3535.67 ; 3298.7,2503.62 3298.7,2640.24 ; 3298.7,3968.62 3298.7,4105.24 ; 3344.13,1305.12 3389.13,1350.12 3389.13,1485.12 3344.13,1530.12 ; 3344.13,1405.12 3299.13,1450.12 3299.13,1585.12 3344.13,1630.12 ; 3344.13,2770.12 3389.13,2815.12 3389.13,2950.12 3344.13,2995.12 ; 3344.13,2870.12 3299.13,2915.12 3299.13,3050.12 3344.13,3095.12 ; 3369.13,1810.12 3369.13,1856.12 3414.13,1901.12 3414.13,2020.67 3364.13,2070.67 ; 3369.13,3275.12 3369.13,3321.12 3414.13,3366.12 3414.13,3485.67 3364.13,3535.67 ; 3379.13,1985.75 3341.18,1985.75 3335.55,1980.12 3257.24,1980.12 3213.13,1980.12 ; 3379.13,3450.75 3341.18,3450.75 3335.55,3445.12 3257.24,3445.12 3213.13,3445.12 ; 3642.2,2640.24 3642.2,2503.62 3642.2,2503.12 ; 3642.2,4105.24 3642.2,3968.62 3642.2,3968.12 ; 3664.13,2190.12 3664.13,2290.12 3664.13,2390.12 3664.13,2435.12 3642.2,2457.05 3642.2,2503.12 ; 3664.13,3655.12 3664.13,3755.12 3664.13,3855.12 3664.13,3900.12 3642.2,3922.05 3642.2,3968.12 ; 3669.13,1305.12 3704.13,1305.12 3714.13,1315.12 3714.13,1445.12 3669.13,1490.12 3669.13,1530.12 3718.13,1579.12 3718.13,1652.12 3639.09,1731.16 3639.09,1755.12 3639.09,1864.12 3646.02,1871.05 3646.02,1980.12 3838.13,1980.12 ; 3669.13,1630.12 3624.13,1585.12 3624.13,1450.12 3669.13,1405.12 3624.13,1360.12 3624.13,1285.12 3649.13,1260.12 4014.13,1260.12 4034.13,1280.12 4034.13,1742.49 4027.13,1749.49 3994.13,1749.49 3969.13,1749.49 3959.13,1759.49 3959.13,1850.12 4004.13,1895.12 4004.13,1925.12 3960.69,1925.12 3925.13,1889.57 3882.24,1889.57 ; 3669.13,2770.12 3704.13,2770.12 3714.13,2780.12 3714.13,2910.12 3669.13,2955.12 3669.13,2995.12 3718.13,3044.12 3718.13,3117.12 3639.09,3196.16 3639.09,3220.12 3639.09,3329.12 3646.02,3336.05 3646.02,3445.12 3838.13,3445.12 ; 3669.13,3095.12 3624.13,3050.12 3624.13,2915.12 3669.13,2870.12 3624.13,2825.12 3624.13,2750.12 3649.13,2725.12 4014.13,2725.12 4034.13,2745.12 4034.13,3207.49 4027.13,3214.49 3994.13,3214.49 3969.13,3214.49 3959.13,3224.49 3959.13,3315.12 4004.13,3360.12 4004.13,3390.12 3960.69,3390.12 3925.13,3354.57 3882.24,3354.57 ; 3709.17,1755.12 3709.17,1690.08 3769.13,1630.12 3769.13,1600.12 3724.13,1555.12 3724.13,1490.12 3769.13,1445.12 3769.13,1405.12 ; 3709.17,3220.12 3709.17,3155.08 3769.13,3095.12 3769.13,3065.12 3724.13,3020.12 3724.13,2955.12 3769.13,2910.12 3769.13,2870.12 ; 3731.77,2535.12 3731.77,2503.12 3642.2,2503.12 ; 3731.77,4000.12 3731.77,3968.12 3642.2,3968.12 ; 3769.13,1305.12 3804.13,1305.12 3814.13,1315.12 3814.13,1445.12 3769.13,1490.12 3769.13,1530.12 ; 3769.13,2770.12 3804.13,2770.12 3814.13,2780.12 3814.13,2910.12 3769.13,2955.12 3769.13,2995.12 ; 3814.13,1755.12 3814.13,1965.12 3838.13,1980.12 ; 3814.13,3220.12 3814.13,3430.12 3838.13,3445.12 ; 3834.13,2535.12 3834.13,2495.12 3876.13,2453.12 4027.13,2453.12 4109.13,2535.12 4109.13,2465.12 4114.13,2460.12 4114.13,2390.12 4114.13,2290.12 4114.13,2190.12 3989.13,2070.67 ; 3834.13,4000.12 3834.13,3960.12 3876.13,3918.12 4027.13,3918.12 4109.13,4000.12 4109.13,3930.12 4114.13,3925.12 4114.13,3855.12 4114.13,3755.12 4114.13,3655.12 3989.13,3535.67 ; 3869.13,1405.12 3869.13,1445.12 3824.13,1490.12 3824.13,1615.12 3839.13,1630.12 3869.13,1630.12 3869.13,1684.12 3884.21,1699.2 3884.21,1755.12 ; 3869.13,2870.12 3869.13,2910.12 3824.13,2955.12 3824.13,3080.12 3839.13,3095.12 3869.13,3095.12 3869.13,3149.12 3884.21,3164.2 3884.21,3220.12 ; 3877.24,2390.12 3877.24,2290.12 3877.24,2190.12 3823.13,2136.01 3823.13,1995.12 3838.13,1980.12 ; 3877.24,3855.12 3877.24,3755.12 3877.24,3655.12 3823.13,3601.01 3823.13,3460.12 3838.13,3445.12 ; 3882.24,2070.67 3989.13,2070.67 ; 3882.24,3535.67 3989.13,3535.67 ; 3923.7,2503.62 3923.7,2640.24 ; 3923.7,3968.62 3923.7,4105.24 ; 3969.13,1305.12 4014.13,1350.12 4014.13,1485.12 3969.13,1530.12 ; 3969.13,1405.12 3924.13,1450.12 3924.13,1585.12 3969.13,1630.12 ; 3969.13,2770.12 4014.13,2815.12 4014.13,2950.12 3969.13,2995.12 ; 3969.13,2870.12 3924.13,2915.12 3924.13,3050.12 3969.13,3095.12 ; 3994.13,1810.12 3994.13,1856.12 4039.13,1901.12 4039.13,2020.67 3989.13,2070.67 ; 3994.13,3275.12 3994.13,3321.12 4039.13,3366.12 4039.13,3485.67 3989.13,3535.67 ; 4004.13,1985.75 3966.18,1985.75 3960.55,1980.12 3882.24,1980.12 3838.13,1980.12 ; 4004.13,3450.75 3966.18,3450.75 3960.55,3445.12 3882.24,3445.12 3838.13,3445.12 ; 4267.2,2640.24 4267.2,2503.62 4267.2,2503.12 ; 4267.2,4105.24 4267.2,3968.62 4267.2,3968.12 ; 4289.13,2190.12 4289.13,2290.12 4289.13,2390.12 4289.13,2435.12 4267.2,2457.05 4267.2,2503.12 ; 4289.13,3655.12 4289.13,3755.12 4289.13,3855.12 4289.13,3900.12 4267.2,3922.05 4267.2,3968.12 ; 4294.13,1305.12 4329.13,1305.12 4339.13,1315.12 4339.13,1445.12 4294.13,1490.12 4294.13,1530.12 4343.13,1579.12 4343.13,1652.12 4264.09,1731.16 4264.09,1755.12 4264.09,1864.12 4271.02,1871.05 4271.02,1980.12 4463.13,1980.12 ; 4294.13,1630.12 4249.13,1585.12 4249.13,1450.12 4294.13,1405.12 4249.13,1360.12 4249.13,1285.12 4274.13,1260.12 4639.13,1260.12 4659.13,1280.12 4659.13,1742.49 4652.13,1749.49 4619.13,1749.49 4594.13,1749.49 4584.13,1759.49 4584.13,1850.12 4629.13,1895.12 4629.13,1925.12 4585.69,1925.12 4550.13,1889.57 4507.24,1889.57 ; 4294.13,2770.12 4329.13,2770.12 4339.13,2780.12 4339.13,2910.12 4294.13,2955.12 4294.13,2995.12 4343.13,3044.12 4343.13,3117.12 4264.09,3196.16 4264.09,3220.12 4264.09,3329.12 4271.02,3336.05 4271.02,3445.12 4463.13,3445.12 ; 4294.13,3095.12 4249.13,3050.12 4249.13,2915.12 4294.13,2870.12 4249.13,2825.12 4249.13,2750.12 4274.13,2725.12 4639.13,2725.12 4659.13,2745.12 4659.13,3207.49 4652.13,3214.49 4619.13,3214.49 4594.13,3214.49 4584.13,3224.49 4584.13,3315.12 4629.13,3360.12 4629.13,3390.12 4585.69,3390.12 4550.13,3354.57 4507.24,3354.57 ; 4334.17,1755.12 4334.17,1690.08 4394.13,1630.12 4394.13,1600.12 4349.13,1555.12 4349.13,1490.12 4394.13,1445.12 4394.13,1405.12 ; 4334.17,3220.12 4334.17,3155.08 4394.13,3095.12 4394.13,3065.12 4349.13,3020.12 4349.13,2955.12 4394.13,2910.12 4394.13,2870.12 ; 4356.77,2535.12 4356.77,2503.12 4267.2,2503.12 ; 4356.77,4000.12 4356.77,3968.12 4267.2,3968.12 ; 4394.13,1305.12 4429.13,1305.12 4439.13,1315.12 4439.13,1445.12 4394.13,1490.12 4394.13,1530.12 ; 4394.13,2770.12 4429.13,2770.12 4439.13,2780.12 4439.13,2910.12 4394.13,2955.12 4394.13,2995.12 ; 4439.13,1755.12 4439.13,1965.12 4463.13,1980.12 ; 4439.13,3220.12 4439.13,3430.12 4463.13,3445.12 ; 4459.13,2535.12 4459.13,2495.12 4501.13,2453.12 4652.13,2453.12 4734.13,2535.12 4734.13,2465.12 4739.13,2460.12 4739.13,2390.12 4739.13,2290.12 4739.13,2190.12 4614.13,2070.67 ; 4459.13,4000.12 4459.13,3960.12 4501.13,3918.12 4652.13,3918.12 4734.13,4000.12 4734.13,3930.12 4739.13,3925.12 4739.13,3855.12 4739.13,3755.12 4739.13,3655.12 4614.13,3535.67 ; 4494.13,1405.12 4494.13,1445.12 4449.13,1490.12 4449.13,1615.12 4464.13,1630.12 4494.13,1630.12 4494.13,1684.12 4509.21,1699.2 4509.21,1755.12 ; 4494.13,2870.12 4494.13,2910.12 4449.13,2955.12 4449.13,3080.12 4464.13,3095.12 4494.13,3095.12 4494.13,3149.12 4509.21,3164.2 4509.21,3220.12 ; 4502.24,2390.12 4502.24,2290.12 4502.24,2190.12 4448.13,2136.01 4448.13,1995.12 4463.13,1980.12 ; 4502.24,3855.12 4502.24,3755.12 4502.24,3655.12 4448.13,3601.01 4448.13,3460.12 4463.13,3445.12 ; 4507.24,2070.67 4614.13,2070.67 ; 4507.24,3535.67 4614.13,3535.67 ; 4548.7,2503.62 4548.7,2640.24 ; 4548.7,3968.62 4548.7,4105.24 ; 4594.13,1305.12 4639.13,1350.12 4639.13,1485.12 4594.13,1530.12 ; 4594.13,1405.12 4549.13,1450.12 4549.13,1585.12 4594.13,1630.12 ; 4594.13,2770.12 4639.13,2815.12 4639.13,2950.12 4594.13,2995.12 ; 4594.13,2870.12 4549.13,2915.12 4549.13,3050.12 4594.13,3095.12 ; 4619.13,1810.12 4619.13,1856.12 4664.13,1901.12 4664.13,2020.67 4614.13,2070.67 ; 4619.13,3275.12 4619.13,3321.12 4664.13,3366.12 4664.13,3485.67 4614.13,3535.67 ; 4629.13,1985.75 4591.18,1985.75 4585.55,1980.12 4507.24,1980.12 4463.13,1980.12 ; 4629.13,3450.75 4591.18,3450.75 4585.55,3445.12 4507.24,3445.12 4463.13,3445.12 ; 4892.2,2640.24 4892.2,2503.62 4892.2,2503.12 ; 4892.2,4105.24 4892.2,3968.62 4892.2,3968.12 ; 4914.13,2190.12 4914.13,2290.12 4914.13,2390.12 4914.13,2435.12 4892.2,2457.05 4892.2,2503.12 ; 4914.13,3655.12 4914.13,3755.12 4914.13,3855.12 4914.13,3900.12 4892.2,3922.05 4892.2,3968.12 ; 4919.13,1305.12 4954.13,1305.12 4964.13,1315.12 4964.13,1445.12 4919.13,1490.12 4919.13,1530.12 4968.13,1579.12 4968.13,1652.12 4889.09,1731.16 4889.09,1755.12 4889.09,1864.12 4896.02,1871.05 4896.02,1980.12 5088.13,1980.12 ; 4919.13,1630.12 4874.13,1585.12 4874.13,1450.12 4919.13,1405.12 4874.13,1360.12 4874.13,1285.12 4899.13,1260.12 5264.13,1260.12 5284.13,1280.12 5284.13,1742.49 5277.13,1749.49 5244.13,1749.49 5219.13,1749.49 5209.13,1759.49 5209.13,1850.12 5254.13,1895.12 5254.13,1925.12 5210.69,1925.12 5175.13,1889.57 5132.24,1889.57 ; 4919.13,2770.12 4954.13,2770.12 4964.13,2780.12 4964.13,2910.12 4919.13,2955.12 4919.13,2995.12 4968.13,3044.12 4968.13,3117.12 4889.09,3196.16 4889.09,3220.12 4889.09,3329.12 4896.02,3336.05 4896.02,3445.12 5088.13,3445.12 ; 4919.13,3095.12 4874.13,3050.12 4874.13,2915.12 4919.13,2870.12 4874.13,2825.12 4874.13,2750.12 4899.13,2725.12 5264.13,2725.12 5284.13,2745.12 5284.13,3207.49 5277.13,3214.49 5244.13,3214.49 5219.13,3214.49 5209.13,3224.49 5209.13,3315.12 5254.13,3360.12 5254.13,3390.12 5210.69,3390.12 5175.13,3354.57 5132.24,3354.57 ; 4959.17,1755.12 4959.17,1690.08 5019.13,1630.12 5019.13,1600.12 4974.13,1555.12 4974.13,1490.12 5019.13,1445.12 5019.13,1405.12 ; 4959.17,3220.12 4959.17,3155.08 5019.13,3095.12 5019.13,3065.12 4974.13,3020.12 4974.13,2955.12 5019.13,2910.12 5019.13,2870.12 ; 4981.77,2535.12 4981.77,2503.12 4892.2,2503.12 ; 4981.77,4000.12 4981.77,3968.12 4892.2,3968.12 ; 5019.13,1305.12 5054.13,1305.12 5064.13,1315.12 5064.13,1445.12 5019.13,1490.12 5019.13,1530.12 ; 5019.13,2770.12 5054.13,2770.12 5064.13,2780.12 5064.13,2910.12 5019.13,2955.12 5019.13,2995.12 ; 5064.13,1755.12 5064.13,1965.12 5088.13,1980.12 ; 5064.13,3220.12 5064.13,3430.12 5088.13,3445.12 ; 5084.13,2535.12 5084.13,2495.12 5126.13,2453.12 5277.13,2453.12 5359.13,2535.12 5359.13,2465.12 5364.13,2460.12 5364.13,2390.12 5364.13,2290.12 5364.13,2190.12 5239.13,2070.67 ; 5084.13,4000.12 5084.13,3960.12 5126.13,3918.12 5277.13,3918.12 5359.13,4000.12 5359.13,3930.12 5364.13,3925.12 5364.13,3855.12 5364.13,3755.12 5364.13,3655.12 5239.13,3535.67 ; 5119.13,1405.12 5119.13,1445.12 5074.13,1490.12 5074.13,1615.12 5089.13,1630.12 5119.13,1630.12 5119.13,1684.12 5134.21,1699.2 5134.21,1755.12 ; 5119.13,2870.12 5119.13,2910.12 5074.13,2955.12 5074.13,3080.12 5089.13,3095.12 5119.13,3095.12 5119.13,3149.12 5134.21,3164.2 5134.21,3220.12 ; 5127.24,2390.12 5127.24,2290.12 5127.24,2190.12 5073.13,2136.01 5073.13,1995.12 5088.13,1980.12 ; 5127.24,3855.12 5127.24,3755.12 5127.24,3655.12 5073.13,3601.01 5073.13,3460.12 5088.13,3445.12 ; 5132.24,2070.67 5239.13,2070.67 ; 5132.24,3535.67 5239.13,3535.67 ; 5173.7,2503.62 5173.7,2640.24 ; 5173.7,3968.62 5173.7,4105.24 ; 5219.13,1305.12 5264.13,1350.12 5264.13,1485.12 5219.13,1530.12 ; 5219.13,1405.12 5174.13,1450.12 5174.13,1585.12 5219.13,1630.12 ; 5219.13,2770.12 5264.13,2815.12 5264.13,2950.12 5219.13,2995.12 ; 5219.13,2870.12 5174.13,2915.12 5174.13,3050.12 5219.13,3095.12 ; 5244.13,1810.12 5244.13,1856.12 5289.13,1901.12 5289.13,2020.67 5239.13,2070.67 ; 5244.13,3275.12 5244.13,3321.12 5289.13,3366.12 5289.13,3485.67 5239.13,3535.67 ; 5254.13,1985.75 5216.18,1985.75 5210.55,1980.12 5132.24,1980.12 5088.13,1980.12 ; 5254.13,3450.75 5216.18,3450.75 5210.55,3445.12 5132.24,3445.12 5088.13,3445.12
  Bottom Layer w10: 2392.64,4105.12 2392.64,4106 2565.57,4106 2566.57,4105 2674.14,4105 2674.14,4105.12 2763.57,4105.12 2768.68,4100 2859.57,4100 ; 2414.57,3655 2414.57,3380 2419.57,3375 2419.57,3095 ; 2419.57,2770 2464.57,2815 2574.57,2815 2619.57,2770 ; 2419.57,2995 2464.57,3040 2574.57,3040 2619.57,2995 ; 3017.2,2640.24 3017.2,2641.12 3190.13,2641.12 3191.13,2640.12 3298.7,2640.12 3298.7,2640.24 3388.13,2640.24 3393.25,2635.12 3484.13,2635.12 ; 3017.2,4105.24 3017.2,4106.12 3190.13,4106.12 3191.13,4105.12 3298.7,4105.12 3298.7,4105.24 3388.13,4105.24 3393.25,4100.12 3484.13,4100.12 ; 3039.13,2190.12 3039.13,1915.12 3044.13,1910.12 3044.13,1630.12 ; 3039.13,3655.12 3039.13,3380.12 3044.13,3375.12 3044.13,3095.12 ; 3044.13,1305.12 3089.13,1350.12 3199.13,1350.12 3244.13,1305.12 ; 3044.13,1530.12 3089.13,1575.12 3199.13,1575.12 3244.13,1530.12 ; 3044.13,2770.12 3089.13,2815.12 3199.13,2815.12 3244.13,2770.12 ; 3044.13,2995.12 3089.13,3040.12 3199.13,3040.12 3244.13,2995.12 ; 3642.2,2640.24 3642.2,2641.12 3815.13,2641.12 3816.13,2640.12 3923.7,2640.12 3923.7,2640.24 4013.13,2640.24 4018.25,2635.12 4109.13,2635.12 ; 3642.2,4105.24 3642.2,4106.12 3815.13,4106.12 3816.13,4105.12 3923.7,4105.12 3923.7,4105.24 4013.13,4105.24 4018.25,4100.12 4109.13,4100.12 ; 3664.13,2190.12 3664.13,1915.12 3669.13,1910.12 3669.13,1630.12 ; 3664.13,3655.12 3664.13,3380.12 3669.13,3375.12 3669.13,3095.12 ; 3669.13,1305.12 3714.13,1350.12 3824.13,1350.12 3869.13,1305.12 ; 3669.13,1530.12 3714.13,1575.12 3824.13,1575.12 3869.13,1530.12 ; 3669.13,2770.12 3714.13,2815.12 3824.13,2815.12 3869.13,2770.12 ; 3669.13,2995.12 3714.13,3040.12 3824.13,3040.12 3869.13,2995.12 ; 4267.2,2640.24 4267.2,2641.12 4440.13,2641.12 4441.13,2640.12 4548.7,2640.12 4548.7,2640.24 4638.13,2640.24 4643.25,2635.12 4734.13,2635.12 ; 4267.2,4105.24 4267.2,4106.12 4440.13,4106.12 4441.13,4105.12 4548.7,4105.12 4548.7,4105.24 4638.13,4105.24 4643.25,4100.12 4734.13,4100.12 ; 4289.13,2190.12 4289.13,1915.12 4294.13,1910.12 4294.13,1630.12 ; 4289.13,3655.12 4289.13,3380.12 4294.13,3375.12 4294.13,3095.12 ; 4294.13,1305.12 4339.13,1350.12 4449.13,1350.12 4494.13,1305.12 ; 4294.13,1530.12 4339.13,1575.12 4449.13,1575.12 4494.13,1530.12 ; 4294.13,2770.12 4339.13,2815.12 4449.13,2815.12 4494.13,2770.12 ; 4294.13,2995.12 4339.13,3040.12 4449.13,3040.12 4494.13,2995.12 ; 4892.2,2640.24 4892.2,2641.12 5065.13,2641.12 5066.13,2640.12 5173.7,2640.12 5173.7,2640.24 5263.13,2640.24 5268.25,2635.12 5359.13,2635.12 ; 4892.2,4105.24 4892.2,4106.12 5065.13,4106.12 5066.13,4105.12 5173.7,4105.12 5173.7,4105.24 5263.13,4105.24 5268.25,4100.12 5359.13,4100.12 ; 4914.13,2190.12 4914.13,1915.12 4919.13,1910.12 4919.13,1630.12 ; 4914.13,3655.12 4914.13,3380.12 4919.13,3375.12 4919.13,3095.12 ; 4919.13,1305.12 4964.13,1350.12 5074.13,1350.12 5119.13,1305.12 ; 4919.13,1530.12 4964.13,1575.12 5074.13,1575.12 5119.13,1530.12 ; 4919.13,2770.12 4964.13,2815.12 5074.13,2815.12 5119.13,2770.12 ; 4919.13,2995.12 4964.13,3040.12 5074.13,3040.12 5119.13,2995.12

## Other copper
Top Layer:
  text "qq 978020607" at 2859.57,3430 h60 r270
  text "qq 978020607" at 3484.13,3430.12 h60 r270
  text "qq 978020607" at 4109.13,3430.12 h60 r270
  text "qq 978020607" at 4734.13,3430.12 h60 r270
  text "qq 978020607" at 5359.13,3430.12 h60 r270
  text "qq 978020607" at 2859.57,1965 h60 r270
  text "qq 978020607" at 3484.13,1965.12 h60 r270
  text "qq 978020607" at 4109.13,1965.12 h60 r270
  text "qq 978020607" at 4734.13,1965.12 h60 r270
  text "qq 978020607" at 5359.13,1965.12 h60 r270

## Silkscreen, mask and mechanical layers (free items; w line width, h text height)
Top Overlay:
  lines w10: 2310,2705 5445,2705 ; 2940,1235 2940,4175 ; 3560,1235 3565,1240 3565,4175 ; 4185,1235 4185,4175 ; 4820,1240 4820,4175 ; 2305,1255 2305,4170 2310,4175 5435,4175 5445,4165 5445,1250 5430,1235 2325,1235 2305,1255

## Text inside footprints (layer, text, board x,y; h text height)
P0: Top Overlay "8" at 2359.57,1325 h50 r180; Top Overlay "7" at 2359.57,1425 h50 r180; Top Overlay "1" at 2799.57,1425 h50 r180; Top Overlay "2" at 2819.57,1325 h50 r180
P0_1: Top Overlay "2" at 3444.13,1325.12 h50 r180; Top Overlay "1" at 3424.13,1425.12 h50 r180; Top Overlay "7" at 2984.13,1425.12 h50 r180; Top Overlay "8" at 2984.13,1325.12 h50 r180
P0_1_1: Top Overlay "2" at 3444.13,2790.12 h50 r180; Top Overlay "1" at 3424.13,2890.12 h50 r180; Top Overlay "7" at 2984.13,2890.12 h50 r180; Top Overlay "8" at 2984.13,2790.12 h50 r180
P0_2: Top Overlay "2" at 4069.13,1325.12 h50 r180; Top Overlay "1" at 4049.13,1425.12 h50 r180; Top Overlay "7" at 3609.13,1425.12 h50 r180; Top Overlay "8" at 3609.13,1325.12 h50 r180
P0_2_1: Top Overlay "2" at 4069.13,2790.12 h50 r180; Top Overlay "1" at 4049.13,2890.12 h50 r180; Top Overlay "7" at 3609.13,2890.12 h50 r180; Top Overlay "8" at 3609.13,2790.12 h50 r180
P0_3: Top Overlay "2" at 4694.13,1325.12 h50 r180; Top Overlay "1" at 4674.13,1425.12 h50 r180; Top Overlay "7" at 4234.13,1425.12 h50 r180; Top Overlay "8" at 4234.13,1325.12 h50 r180
P0_3_1: Top Overlay "2" at 4694.13,2790.12 h50 r180; Top Overlay "1" at 4674.13,2890.12 h50 r180; Top Overlay "7" at 4234.13,2890.12 h50 r180; Top Overlay "8" at 4234.13,2790.12 h50 r180
P0_4: Top Overlay "2" at 5319.13,1325.12 h50 r180; Top Overlay "1" at 5299.13,1425.12 h50 r180; Top Overlay "7" at 4859.13,1425.12 h50 r180; Top Overlay "8" at 4859.13,1325.12 h50 r180
P0_4_1: Top Overlay "2" at 5319.13,2790.12 h50 r180; Top Overlay "1" at 5299.13,2890.12 h50 r180; Top Overlay "7" at 4859.13,2890.12 h50 r180; Top Overlay "8" at 4859.13,2790.12 h50 r180
P0_5: Top Overlay "2" at 2819.57,2790 h50 r180; Top Overlay "1" at 2799.57,2890 h50 r180; Top Overlay "7" at 2359.57,2890 h50 r180; Top Overlay "8" at 2359.57,2790 h50 r180
P1: Top Overlay "8" at 2359.57,1550 h50 r180; Top Overlay "7" at 2359.57,1650 h50 r180; Top Overlay "1" at 2799.57,1650 h50 r180; Top Overlay "2" at 2819.57,1550 h50 r180
P1_1: Top Overlay "2" at 3444.13,1550.12 h50 r180; Top Overlay "1" at 3424.13,1650.12 h50 r180; Top Overlay "7" at 2984.13,1650.12 h50 r180; Top Overlay "8" at 2984.13,1550.12 h50 r180
P1_1_1: Top Overlay "2" at 3444.13,3015.12 h50 r180; Top Overlay "1" at 3424.13,3115.12 h50 r180; Top Overlay "7" at 2984.13,3115.12 h50 r180; Top Overlay "8" at 2984.13,3015.12 h50 r180
P1_2: Top Overlay "2" at 4069.13,1550.12 h50 r180; Top Overlay "1" at 4049.13,1650.12 h50 r180; Top Overlay "7" at 3609.13,1650.12 h50 r180; Top Overlay "8" at 3609.13,1550.12 h50 r180
P1_2_1: Top Overlay "2" at 4069.13,3015.12 h50 r180; Top Overlay "1" at 4049.13,3115.12 h50 r180; Top Overlay "7" at 3609.13,3115.12 h50 r180; Top Overlay "8" at 3609.13,3015.12 h50 r180
P1_3: Top Overlay "2" at 4694.13,1550.12 h50 r180; Top Overlay "1" at 4674.13,1650.12 h50 r180; Top Overlay "7" at 4234.13,1650.12 h50 r180; Top Overlay "8" at 4234.13,1550.12 h50 r180
P1_3_1: Top Overlay "2" at 4694.13,3015.12 h50 r180; Top Overlay "1" at 4674.13,3115.12 h50 r180; Top Overlay "7" at 4234.13,3115.12 h50 r180; Top Overlay "8" at 4234.13,3015.12 h50 r180
P1_4: Top Overlay "2" at 5319.13,1550.12 h50 r180; Top Overlay "1" at 5299.13,1650.12 h50 r180; Top Overlay "7" at 4859.13,1650.12 h50 r180; Top Overlay "8" at 4859.13,1550.12 h50 r180
P1_4_1: Top Overlay "2" at 5319.13,3015.12 h50 r180; Top Overlay "1" at 5299.13,3115.12 h50 r180; Top Overlay "7" at 4859.13,3115.12 h50 r180; Top Overlay "8" at 4859.13,3015.12 h50 r180
P1_5: Top Overlay "2" at 2819.57,3015 h50 r180; Top Overlay "1" at 2799.57,3115 h50 r180; Top Overlay "7" at 2359.57,3115 h50 r180; Top Overlay "8" at 2359.57,3015 h50 r180